# Altium PCB BLDC_DRIVER_DOOR.PcbDoc
Units mm, origin at the board's own origin, x right, y up, seen from the top; angles counter-clockwise.
Board outline 60 x 40 mm, 2 copper layers (Top Layer, Bottom Layer); 66 components, 57 nets, 242 pads, 212 vias.
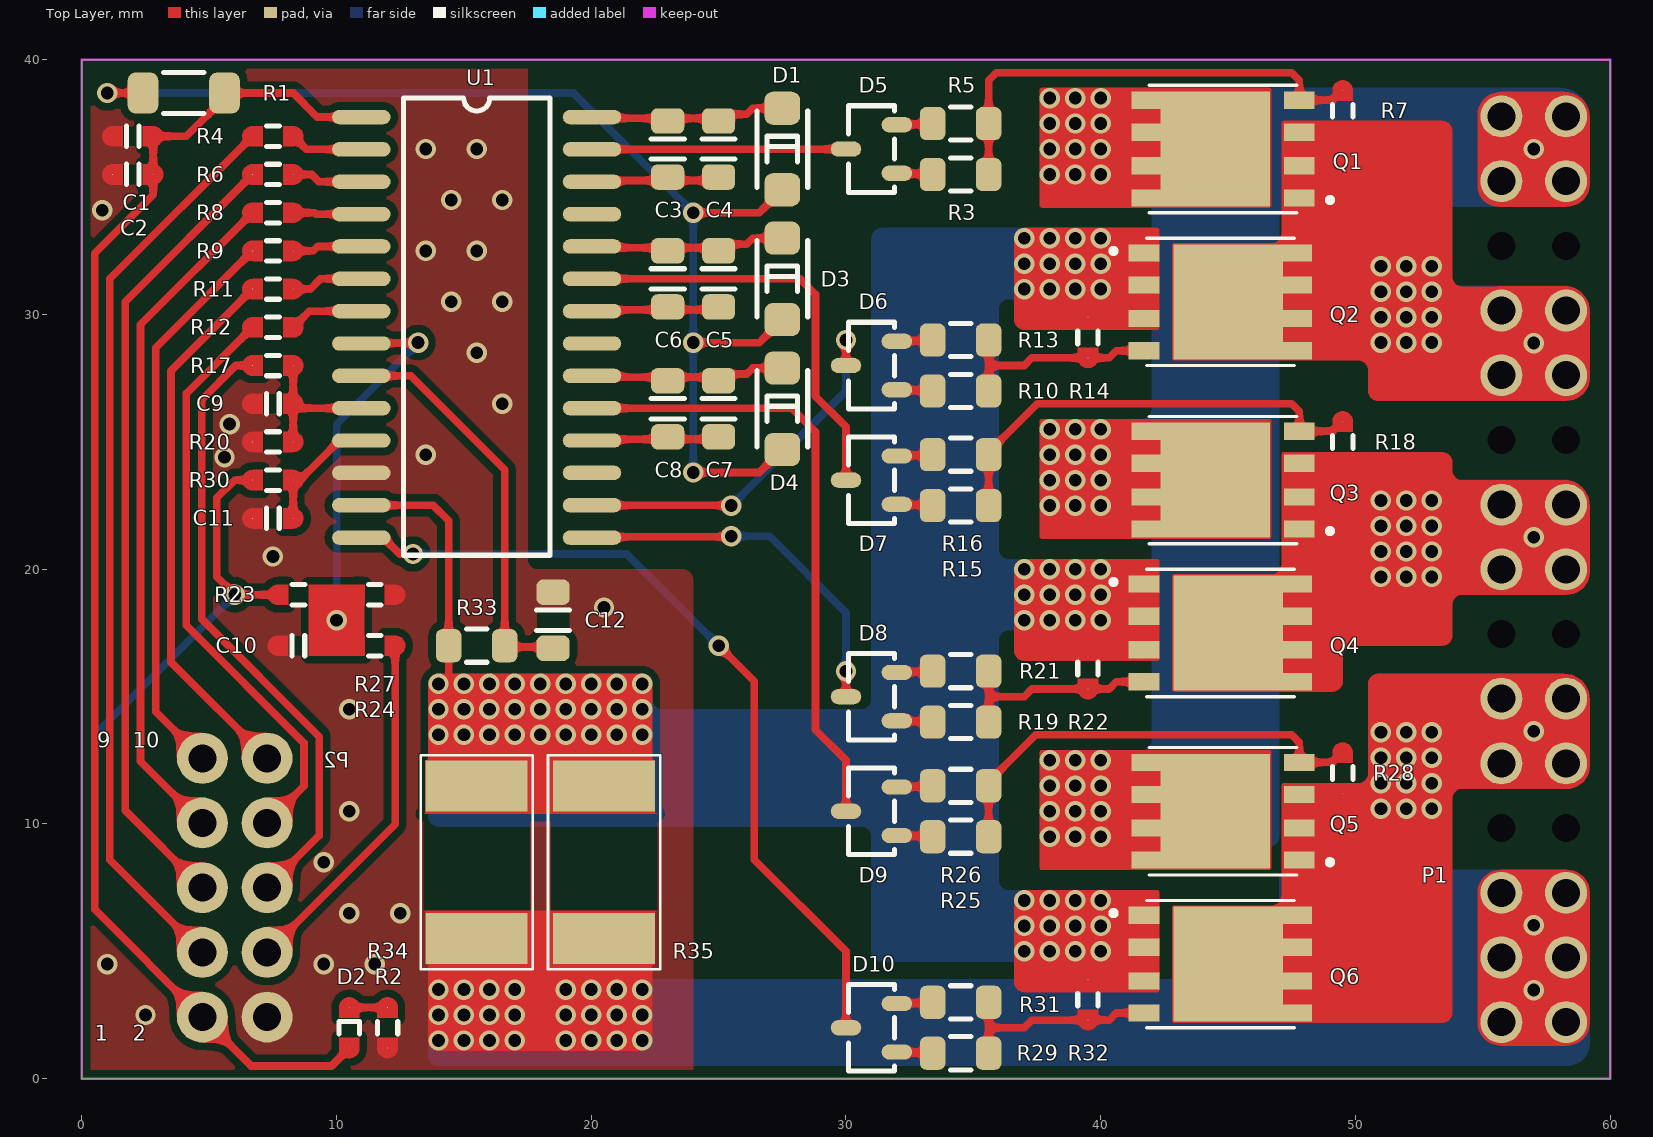
[diagram p0: Top Layer view]
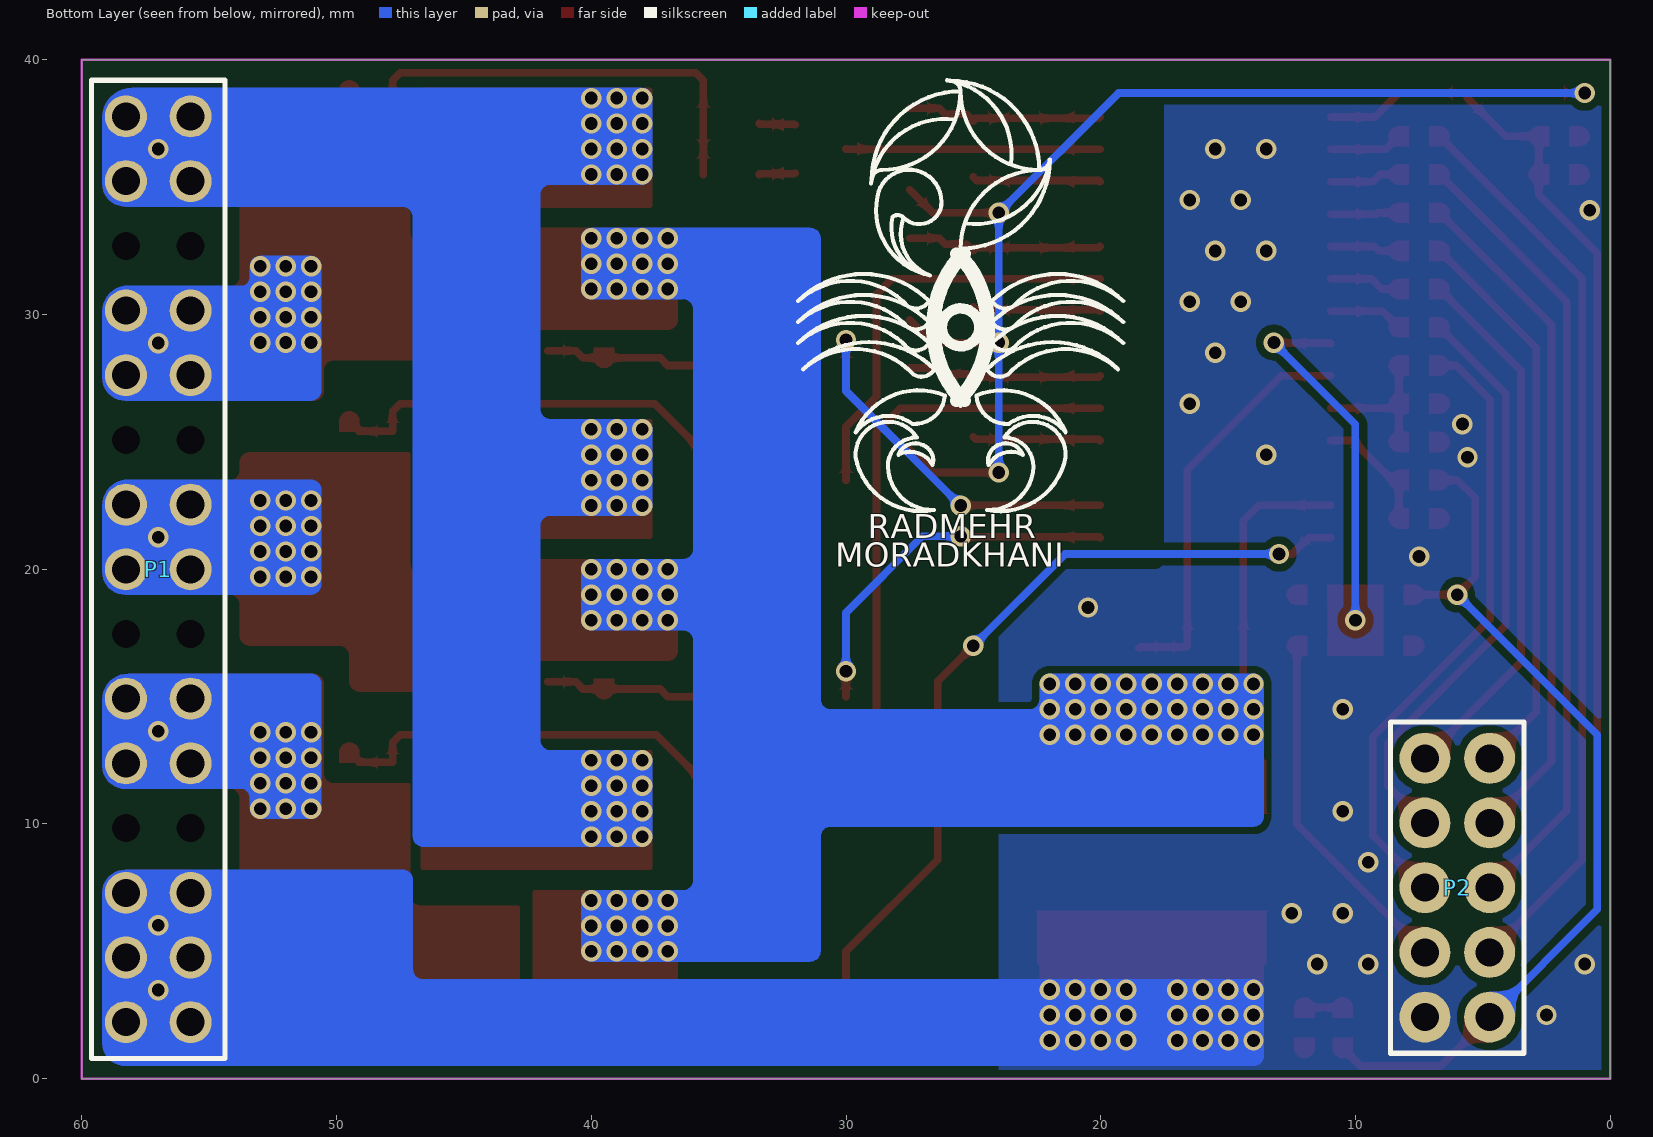
[diagram p1: Bottom Layer view, seen from below]
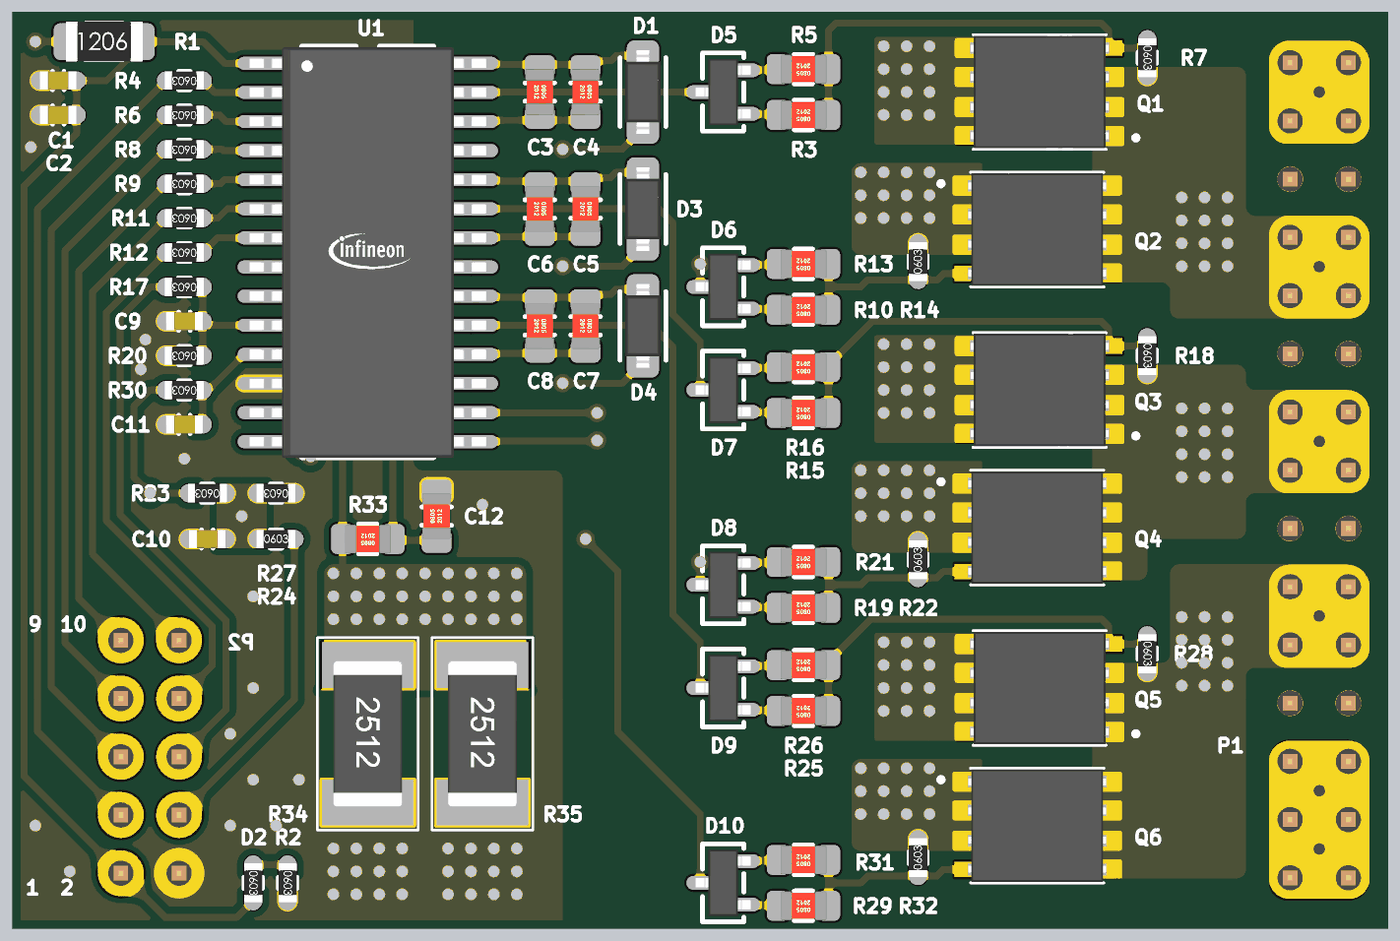
[diagram p2: 3D render of the assembled board from above, using the file's embedded part models]

## Layer stack, top to bottom
Top Solder: solder mask 0.0102, Solder Resist, Dk 3.5
Top Layer: signal copper 0.0356
Dielectric 1: dielectric 0.32, FR-4, Dk 4.8
Bottom Layer: signal copper 0.0356
Bottom Solder: solder mask 0.0102, Solder Resist, Dk 3.5

## Board outline
0,0 60,0 60,40 0,40

## Design rules (kind name [scope] priority, off if disabled: settings)
Clearance [All] p1: gap=0.3 ignorepadtopadclearanceinfootprint=FALSE
PlaneConnect [All] p1: planeconnectstyle=Relief reliefexpansion=0.508 reliefentries=4 reliefconductorwidth=0.3 reliefairgap=0.3
PolygonConnect [All] p1: connectstyle=Direct reliefconductorwidth=0.254 reliefentries=4 polygonreliefangle="90 Angle" airgapwidth=0.254
RoutingVias [All] p1: holewidth=0.5 width=0.8 viastyle="Through Hole" minholewidth=0.5 minwidth=0.8 maxholewidth=0.5 maxwidth=0.8
SolderMaskExpansion [All] p1: expansion=0.102 istentingtop=FALSE
Width [All] p1: maxlimit=1.2 minlimit=0.3 preferedwidth=0.6 minimp=50.000000 maximp=50.000000 favimp=50.000000
29 further rules are at their usual default settings.

## Components (designator, comment, footprint, x,y, rotation, side; value= is the part's Value field where it differs from the comment)
C1 "1U" "C 0603" 2,37 r0 top
C2 "100N" "C 0603" 2,35.5 r0 top
C3 "1U" "C 0805" 23,36.5 r90 top
C4 "100N" "C 0805" 25,36.5 r90 top
C5 "1U" "C 0805" 25,31.4 r90 top
C6 "100N" "C 0805" 23,31.4 r90 top
C7 "1U" "C 0805" 25,26.3 r90 top
C8 "100N" "C 0805" 23,26.3 r90 top
C9 "1U" "C 0603" 7.5,26.5 r0 top
C10 "100N" "C 0603" 8.5,17 r0 top
C11 "1N" "C 0603" 7.5,22 r0 top
C12 "1N" "C 0805" 18.5,18 r270 top
D1 "1N4148" "D SOD-123" 27.5,36.5 r90 top
D2 "LED_SMD" "D 0603" 10.5,2 r90 top
D3 "1N4148" "D SOD-123" 27.5,31.4 r90 top
D4 "1N4148" "D SOD-123" 27.5,26.3 r90 top
D5 "BAT54S" SOT-23_3_D 31,36.5 r180 top
D6 "BAT54S" SOT-23_3_D 31,28 r180 top
D7 "BAT54S" SOT-23_3_D 31,23.5 r180 top
D8 "BAT54S" SOT-23_3_D 31,15 r180 top
D9 "BAT54S" SOT-23_3_D 31,10.5 r180 top
D10 "BAT54S" SOT-23_3_D 31,2 r180 top
P1 "61303021121" 61303021121 57,20 r90 bottom
P2 "61301021121" 61301021121 6,7.5 r90 bottom
Q1 "CSD19533Q5A" Q5A 44.5,36.5 r180 top
Q2 "CSD19533Q5A" Q5A 45,30.5 r0 top
Q3 "CSD19533Q5A" Q5A 44.5,23.5 r180 top
Q4 "CSD19533Q5A" Q5A 45,17.5 r0 top
Q5 "CSD19533Q5A" Q5A 44.5,10.5 r180 top
Q6 "CSD19533Q5A" Q5A 45,4.5 r0 top
R1 "10R" "R 1206" 4,38.7 r0 top
R2 "4.7K" "R 0603" 12,2 r90 top
R3 "56R" "R 0805" 34.5,35.5 r0 top
R4 "1K" "R 0603" 7.5,37 r0 top
R5 "100R" "R 0805" 34.5,37.5 r0 top
R6 "1K" "R 0603" 7.5,35.5 r0 top
R7 "10K" "R 0603" 49.5,38 r90 top
R8 "1K" "R 0603" 7.5,34 r0 top
R9 "1K" "R 0603" 7.5,32.5 r0 top
R10 "56R" "R 0805" 34.5,27 r0 top
R11 "1K" "R 0603" 7.5,31 r0 top
R12 "1K" "R 0603" 7.5,29.5 r0 top
R13 "100R" "R 0805" 34.5,29 r0 top
R14 "10K" "R 0603" 39.5,29.1 r270 top
R15 "56R" "R 0805" 34.5,22.5 r0 top
R16 "100R" "R 0805" 34.5,24.5 r0 top
R17 "1K" "R 0603" 7.5,28 r0 top
R18 "10K" "R 0603" 49.5,25 r90 top
R19 "56R" "R 0805" 34.5,14 r0 top
R20 "10K" "R 0603" 7.5,25 r0 top
R21 "100R" "R 0805" 34.5,16 r0 top
R22 "10K" "R 0603" 39.5,16.1 r270 top
R23 "12K" "R 0603" 8.5,19 r0 top
R24 "1K" "R 0603" 11.5,17 r180 top
R25 "56R" "R 0805" 34.5,9.5 r0 top
R26 "100R" "R 0805" 34.5,11.5 r0 top
R27 "3.3K" "R 0603" 11.5,19 r0 top
R28 "10K" "R 0603" 49.5,12 r90 top
R29 "56R" "R 0805" 34.5,1 r0 top
R30 "10K" "R 0603" 7.5,23.5 r0 top
R31 "100R" "R 0805" 34.5,3 r0 top
R32 "10K" "R 0603" 39.5,3.1 r270 top
R33 "10K" "R 0805" 15.5,17 r0 top
R34 "0R1" "R 2512" 15.5,8.5 r90 top
R35 "0R1" "R 2512" 20.5,8.5 r90 top
U1 "6EDL04I06PT" SOIC-28 15.5,29.5 r0 top

## Footprints (in the part's own frame and the unit in brackets; to place one, negate y for a bottom-side part, rotate by r counter-clockwise, add the part's x,y. Pads: shape width x height; smd on the part's side, far side on the other; paste and mask are expansions set on the pad)
61301021121 [mm] "Pin Header, pitch 2.54 mm, THT, Vertical, dual row, 10p"
  round 2 hole 1.1: 1(-5.08,-1.27) 2(-5.08,1.27) 3(-2.54,-1.27) 4(-2.54,1.27) 5(0,-1.27) 6(0,1.27) 7(2.54,-1.27) 8(2.54,1.27) 9(5.08,-1.27) 10(5.08,1.27)
  silkscreen extent -6.5,-2.62 6.5,2.62, body extent -6.35,-2.54 6.35,2.54, height 8.59
61303021121 [mm] "Pin Header, pitch 2.54 mm, THT, Vertical, dual row, 30p"
  round 1.65 hole 1.1: 1(-17.78,-1.27) 2(-17.78,1.27) 3(-15.24,-1.27) 4(-15.24,1.27) 5(-12.7,-1.27) 6(-12.7,1.27) 9(-7.62,-1.27) 10(-7.62,1.27) 11(-5.08,-1.27) 12(-5.08,1.27) 15(0,-1.27) 16(0,1.27) 17(2.54,-1.27) 18(2.54,1.27) 21(7.62,-1.27) 22(7.62,1.27) 23(10.16,-1.27) 24(10.16,1.27) 27(15.24,-1.27) 28(15.24,1.27) 29(17.78,-1.27) 30(17.78,1.27)
  round 0 hole 1.1: 7(-10.16,-1.27) 8(-10.16,1.27) 13(-2.54,-1.27) 14(-2.54,1.27) 19(5.08,-1.27) 20(5.08,1.27) 25(12.7,-1.27) 26(12.7,1.27)
  silkscreen extent -19.2,-2.62 19.2,2.62, body extent -19.05,-2.54 19.05,2.54, height 8.59
"C 0603" [mil] "C?"
  round 1 smd mask+1.97: 1(-31.5,0) 2(31.5,0)
  Top Layer pour cut-out: -15.75,15.75 15.75,15.75 15.75,-15.75 -15.75,-15.75
  Top Layer region: -47.24,0 -46.04,6.03 -42.63,11.14 -37.52,14.55 -31.5,15.75 -31.5,15.75 -15.75,15.75 -15.75,-15.75 -31.5,-15.75 -37.52,-14.55 -42.63,-11.14 -46.04,-6.03 -47.24,0
  Top Layer region: 47.24,0 46.05,-6.03 42.63,-11.14 37.52,-14.55 31.5,-15.75 31.5,-15.75 15.75,-15.75 15.75,15.75 31.5,15.75 37.52,14.55 42.63,11.14 46.05,6.03 47.24,0
  silkscreen extent -10,-16 10,16, body extent -32,-16 31,16, height 35
"C 0805" [mm] "C?"
  rrect50% 1x1.3 smd: 1(-1.1,0) 2(1.1,0)
  Top Layer pour cut-out: -0.5,0.65 0.5,0.65 0.5,-0.65 -0.5,-0.65
  silkscreen extent -0.4,-0.65 0.4,0.65, body extent -1,-0.63 1,0.62, height 0.9
"D 0603" [mil] "D?"
  round 1 smd mask+1.97: 1(-31.5,0) 2(31.5,0)
  Top Layer pour cut-out: -15.75,15.75 15.75,15.75 15.75,-15.75 -15.75,-15.75
  Top Layer region: -47.24,0 -46.04,6.03 -42.63,11.14 -37.52,14.55 -31.5,15.75 -31.5,15.75 -15.75,15.75 -15.75,-15.75 -31.5,-15.75 -37.52,-14.55 -42.63,-11.14 -46.04,-6.03 -47.24,0
  Top Layer region: 47.24,0 46.05,-6.03 42.63,-11.14 37.52,-14.55 31.5,-15.75 31.5,-15.75 15.75,-15.75 15.75,15.75 31.5,15.75 37.52,14.55 42.63,11.14 46.05,6.03 47.24,0
  silkscreen extent -10,-16 10,16, body extent -33,-16 33,16, height 22
"D SOD-123" [mm] "D?"
  rrect50% 1.3x1.4 smd mask+0.1: 1(-1.6,0) 2(1.6,0)
  Top Layer pour cut-out: -1,0.9 1,0.9 1,-0.9 -1,-0.9
  silkscreen extent -1.5,-1 1.5,1, body extent -1.83,-0.77 1.83,0.77, height 1.54
Q5A [mm] "Q?"
  rect 1.2x0.675 smd paste-1: 1(-3.301,-1.917) 2(2.699,1.917) 2(2.699,-0.66) 2(2.699,0.66) 2(2.699,-1.917) 3(-3.301,-0.66) 3(-3.301,0.66) 3(-3.301,1.917)
  rect 4.295x4.51 smd paste-3: 2(0,0)
  silkscreen extent -4.55,-2.5 2.6,2.5, body extent -3.3,-2.45 2.7,2.45, height 1.11
"R 0603" [mil] "R?"
  round 1 smd mask+1.97: 1(-31.5,0) 2(31.5,0)
  Top Layer pour cut-out: -15.75,15.75 15.75,15.75 15.75,-15.75 -15.75,-15.75
  Top Layer region: 47.24,0 46.05,-6.03 42.63,-11.14 37.52,-14.55 31.5,-15.75 31.5,-15.75 15.75,-15.75 15.75,15.75 31.5,15.75 37.52,14.55 42.63,11.14 46.05,6.03 47.24,0
  Top Layer region: -47.24,0 -46.04,6.03 -42.63,11.14 -37.52,14.55 -31.5,15.75 -31.5,15.75 -15.75,15.75 -15.75,-15.75 -31.5,-15.75 -37.52,-14.55 -42.63,-11.14 -46.04,-6.03 -47.24,0
  silkscreen extent -10,-16 10,16, body extent -33,-16 33,16, height 22
"R 0805" [mm] "R?"
  rrect50% 1x1.3 smd: 1(-1.1,0) 2(1.1,0)
  Top Layer pour cut-out: -0.5,0.65 0.5,0.65 0.5,-0.65 -0.5,-0.65
  silkscreen extent -0.4,-0.65 0.4,0.65, body extent -1,-0.63 1,0.62, height 0.9
"R 1206" [mm] "R?"
  rrect50% 1.2x1.6 smd: 1(-1.6,0) 2(1.6,0)
  Top Layer pour cut-out: -0.9,0.8 0.9,0.8 0.9,-0.8 -0.9,-0.8
  silkscreen extent -0.8,-0.8 0.8,0.8, body extent -1.67,-0.86 1.68,0.87, height 0.85
"R 2512" [mm] "R?"
  rect 2x4 smd: 1(-3,0) 2(3,0)
  Top Layer pour cut-out: -1.9,2.1 1.9,2.1 1.9,-2.1 -1.9,-2.1
  silkscreen extent -4.2,-2.2 4.2,2.2, body extent -3.17,-1.5 3.17,1.5, height 1.6
SOIC-28 [mm] "U?"
  oval 2.298x0.567 smd paste+0 mask+0.102: 1(-4.528,8.255) 2(-4.528,6.985) 3(-4.528,5.715) 4(-4.528,4.445) 5(-4.528,3.175) 6(-4.528,1.905) 7(-4.528,0.635) 8(-4.528,-0.635) 9(-4.528,-1.905) 10(-4.528,-3.175) 11(-4.528,-4.445) 12(-4.528,-5.715) 13(-4.528,-6.985) 14(-4.528,-8.255) 15(4.528,-8.255) 16(4.528,-6.985) 17(4.528,-5.715) 18(4.528,-4.445) 19(4.528,-3.175) 20(4.528,-1.905) 21(4.528,-0.635) 22(4.528,0.635) 23(4.528,1.905) 24(4.528,3.175) 25(4.528,4.445) 26(4.528,5.715) 27(4.528,6.985) 28(4.528,8.255)
  silkscreen extent -2.88,-8.95 2.88,9, body extent -5.16,-8.95 5.16,8.95, height 2.65
SOT-23_3_D [mm] "D?"
  oval 1.2x0.6 smd: 1(-1,0.95) 2(-1,-0.95) 3(1,0)
  silkscreen extent -0.9,-1.7 0.9,1.7, body extent -1.2,-1.45 1.2,1.45, height 1.16

## Part data
C1 C2 C3 C4 C5 C6 C7 C8 C9 C10 C11 C12: library part CAP_SMD, "CAP_SMD"
D1 D3 D4: library part DIOD_SMD, "DIOD_SMD"
P1: "WR-PHD Pin Header, THT, pitch 2.54mm, Dual Row, Vertical, 30p", Contact Resistance=20mOhm, Manufacturer="Wurth Elektronik", Operating Temperature="-40 to +105degC", Rated Current=3A, Withstanding Voltage=500VAC, Working Voltage=250VAC, ComponentLink1Description=Manufacturer, ComponentLink1URL=http://www.we-online.de, ComponentLink2Description=Datasheet, ComponentLink2URL=https://www.we-online.com/catalog/datasheet/61303021121.pdf, Gender="Pin Header", Manufacturer Part Number=61303021121, Mounting Technology=THT, Orientation=Vertical, Packaging=Bag, Pin Number=30, Pitch=2.54mm, Row Number=Dual
P2: "WR-PHD Pin Header, THT, pitch 2.54mm, Dual Row, Vertical, 10p", Contact Resistance=20mOhm, Manufacturer="Wurth Elektronik", Operating Temperature="-40 to +105degC", Rated Current=3A, Withstanding Voltage=500VAC, Working Voltage=250VAC, ComponentLink1Description=Manufacturer, ComponentLink1URL=http://www.we-online.de, ComponentLink2Description=Datasheet, ComponentLink2URL=https://www.we-online.com/catalog/datasheet/61301021121.pdf, Gender="Pin Header", Manufacturer Part Number=61301021121, Mounting Technology=THT, Orientation=Vertical, Packaging=Bag, Pin Number=10, Pitch=2.54mm, Row Number=Dual
R1 R2 R3 R4 R5 R6 R7 R8 R9 R10 R11 R12 R13 R14 R15 R16 R17 R18 R19 R20 R21 R22 R23 R24 R25 R26 R27 R28 R29 R30 R31 R32 R33 R34 R35: library part RES_SMD, "RES_SMD"

## Via types
v1: diameter 0.8, hole 0.5, Top Layer to Bottom Layer, tented both sides, 212 vias

## Nets (pads, with @x,y where several pads share a name; then routed paths per layer and width w, separated by ;. In a path a pad name is that pad's centre, name@x,y a point inside that pad or via, vN(x,y) a via of type N, cw(c..) or ccw(c..) an arc to the next point about the centre after c; other vN are vias at no path point)
+15V0: C1.2 C2.2 D2.1 P2.1 R1.2 R23.1 R30.1 U1.1 | length 81.4
  Top Layer w0.3: R1.2@5.6,38.5 4.1,37 C1.2 C2.2 2.8,34.7 0.5,32.4 0.5,6.65 P2.1 6.65,0.5 9.8,0.5 D2.1 ; R1.2 8.3,38.7 9.245,37.755 U1.1 ; R30.1 6,23.5 5.3,22.8 5.3,19.7 v1(6,19) R23.1
  Bottom Layer w0.3: P2.1 0.5,6.65 0.5,13.5 v1(6,19)
+24V0: P1.27 P1.28 P1.29 P1.30 Q1.2 Q3.2 Q5.2
  other v1: 38,9.5 39,9.5 40,9.5 38,10.5 39,10.5 40,10.5 38,11.5 39,11.5 40,11.5 38,12.5 38,12.5 39,12.5 39,12.5 40,12.5 40,12.5 38,22.5 39,22.5 40,22.5 38,23.5 39,23.5 40,23.5 38,24.5 39,24.5 40,24.5 38,25.5 38,25.5 39,25.5 39,25.5 40,25.5 40,25.5 38,35.5 39,35.5 40,35.5 38,36.5 39,36.5 40,36.5 57,36.5 38,37.5 39,37.5 40,37.5 38,38.5 38,38.5 39,38.5 39,38.5 40,38.5 40,38.5
ENABLE: P2.6 R17.1 | length 24.5
  Top Layer w0.3: R17.1 6.049,28 4.7,26.651 4.7,18.049 9.32,13.429 9.32,9.55 P2.6
FAULT: P2.4 R24.1 | length 14.1
  Top Layer w0.3: P2.4 12.3,9.99 R24.1
GND: C1.1 C2.1 C9.1 C10.1 C11.1 C12.1 P1.1 P1.2 P1.3 P1.4 P1.5 P1.6 P2.2 R2.1 R20.1 R27.2 R34.1 R35.1 U1.12
  other v1: 14,1.5 15,1.5 16,1.5 17,1.5 19,1.5 20,1.5 21,1.5 22,1.5 2.5,2.5 14,2.5 15,2.5 16,2.5 17,2.5 19,2.5 20,2.5 21,2.5 22,2.5 57,3.48 14,3.5 15,3.5 16,3.5 17,3.5 19,3.5 20,3.5 21,3.5 22,3.5 1,4.5 9.5,4.5 11.5,4.5 57,6.02 10.5,6.5 12.5,6.5 9.5,8.5 10.5,10.5 10.5,14.5 20.5,18.5 7.5,20.5 5.6,24.4 13.5,24.5 5.8,25.7 16.5,26.5 15.5,28.5 14.5,30.5 16.5,30.5 13.5,32.5 15.5,32.5 0.8,34.1 14.5,34.5 16.5,34.5 13.5,36.5 15.5,36.5
NetC3_1: C3.1 C4.1 U1.26 | length 5
  Top Layer w0.3: U1.26 20.079,35.266 24.866,35.266 C4.1
NetC3_2: C3.2 C4.2 D1.2 U1.28 | length 7.7
  Top Layer w0.3: U1.28 20.079,37.704 24.896,37.704 C4.2 25.266,37.866 26.1,37.866 26.334,38.1 D1.2
NetC5_1: C5.1 C6.1 U1.22 | length 5
  Top Layer w0.3: U1.22 20.079,30.186 24.886,30.186 C5.1
NetC5_2: C5.2 C6.2 D3.2 U1.24 | length 7.8
  Top Layer w0.3: U1.24 20.079,32.624 24.876,32.624 C5.2 25.266,32.766 26.1,32.766 26.334,33 D3.2
NetC7_1: C7.1 C8.1 U1.18 | length 5
  Top Layer w0.3: U1.18 20.079,25.106 24.906,25.106 C7.1
NetC7_2: C7.2 C8.2 D4.2 U1.20 | length 7.8
  Top Layer w0.3: U1.20 20.079,27.544 24.856,27.544 C7.2 25.266,27.666 26.1,27.666 26.334,27.9 D4.2
NetC9_2: C9.2 R17.2 R20.2 U1.10 | length 5.7
  Top Layer w0.3: R20.2 C9.2 ; R17.2 C9.2 ; U1.10 8.475,26.325 C9.2
NetC10_2: C10.2 R23.2 R24.2 R27.1 U1.8 | length 14.5
  Top Layer w0.3: U1.8 10.989,28.883 13.182,28.883 v1(13.2,28.9)
  Bottom Layer w0.3: v1(10,18) 10,25.7 v1(13.2,28.9)
NetC11_2: C11.2 R30.2 U1.11 | length 4.8
  Top Layer w0.3: C11.2 R30.2 8.552,23.5 10.107,25.055 U1.11
NetC12_2: C12.2 R33.2 U1.9 | length 16
  Top Layer w0.3: U1.9 12.905,27.595 16.6,23.9 R33.2 16.65,16.95 18.45,16.95 C12.2
NetD1_1: D1.1 D3.1 D4.1 R1.1 | length 48.2
  Top Layer w0.3: v1(1,38.7) R1.1 ; v1(24,23.8) 26.6,23.8 D4.1 ; v1(24,28.9) 26.6,28.9 D3.1 ; v1(24,34) 26.6,34 D1.1
  Bottom Layer w0.3: v1(1,38.7) 19.3,38.7 v1(24,34) v1(24,28.9) v1(24,23.8)
NetD2_2: D2.2 R2.2 | length 1.5
  Top Layer w0.3: D2.2 R2.2
NetD5_1: D5.1 R3.1 | length 1.4
  Top Layer w0.3: D5.1 32.025,35.525 33.375,35.525 R3.1
NetD5_2: D5.2 R5.1 | length 1.4
  Top Layer w0.3: D5.2 32.025,37.475 33.375,37.475 R5.1
NetD5_3: D5.3 U1.27 | length 10
  Top Layer w0.3: U1.27 20.036,36.493 29.992,36.493 D5.3
NetD6_1: D6.1 R10.1 | length 1.4
  Top Layer w0.3: D6.1 32.025,27.025 33.375,27.025 R10.1
NetD6_2: D6.2 R13.1 | length 1.4
  Top Layer w0.3: D6.2 32.025,28.975 33.375,28.975 R13.1
NetD6_3: D6.3 U1.16 | length 14.8
  Top Layer w0.3: U1.16 20.036,22.507 25.493,22.507 v1(25.5,22.5) ; D6.3 v1(30,29)
  Bottom Layer w0.3: v1(25.5,22.5) 30,27 v1(30,29)
NetD7_1: D7.1 R15.1 | length 1.4
  Top Layer w0.3: D7.1 32.025,22.525 33.375,22.525 R15.1
NetD7_2: D7.2 R16.1 | length 1.4
  Top Layer w0.3: D7.2 32.025,24.475 33.375,24.475 R16.1
NetD7_3: D7.3 U1.23 | length 16.8
  Top Layer w0.3: U1.23 28.195,31.405 28.8,30.8 28.8,26.8 30,25.6 D7.3
NetD8_1: D8.1 R19.1 | length 1.4
  Top Layer w0.3: D8.1 32.025,14.025 33.375,14.025 R19.1
NetD8_2: D8.2 R21.1 | length 1.4
  Top Layer w0.3: D8.2 32.025,15.975 33.375,15.975 R21.1
NetD8_3: D8.3 U1.15 | length 14.5
  Top Layer w0.3: U1.15 20.056,21.273 25.472,21.273 v1(25.5,21.3) ; D8.3 v1(30,16)
  Bottom Layer w0.3: v1(25.5,21.3) 27,21.3 30,18.3 v1(30,16)
NetD9_1: D9.1 R25.1 | length 1.4
  Top Layer w0.3: D9.1 32.025,9.525 33.375,9.525 R25.1
NetD9_2: D9.2 R26.1 | length 1.4
  Top Layer w0.3: D9.2 32.025,11.475 33.375,11.475 R26.1
NetD9_3: D9.3 U1.19 | length 24.6
  Top Layer w0.3: U1.19 27.875,26.325 28.8,25.4 28.8,13.7 30,12.5 D9.3
NetD10_1: D10.1 R29.1 | length 1.4
  Top Layer w0.3: D10.1 32.025,1.025 33.375,1.025 R29.1
NetD10_2: D10.2 R31.1 | length 1.4
  Top Layer w0.3: D10.2 32.025,2.975 33.375,2.975 R31.1
NetD10_3: D10.3 U1.14 | length 32.9
  Top Layer w0.3: U1.14 11.837,21.245 12.482,20.6 v1(13,20.6) ; v1(25,17) 26.4,15.6 26.4,8.6 30,5 D10.3
  Bottom Layer w0.3: v1(13,20.6) 21.4,20.6 v1(25,17)
NetQ1_1: Q1.1 R3.2 R5.2 R7.2 | length 18.8
  Top Layer w0.3: R3.2 R5.2 35.6,39.2 35.9,39.5 47.5,39.5 47.801,39.199 Q1.1 49.117,38.417 R7.2
NetQ2_1: Q2.1 R10.2 R13.2 R14.2 | length 8.3
  Top Layer w0.3: R10.2 35.6,28 ; R13.2 35.6,28 ; Q2.1 40.609,28.583 40.327,28.3 R14.2 37.3,28.3 37,28 35.6,28
NetQ3_1: Q3.1 R15.2 R16.2 R18.2 | length 17.7
  Top Layer w0.3: R15.2 R16.2 ; R16.2@35.622,24.618 37.504,26.5 47.5,26.5 47.801,26.199 Q3.1 49.118,25.418 R18.2
NetQ4_1: Q4.1 R19.2 R21.2 R22.2 | length 8.3
  Top Layer w0.3: R19.2 35.6,15 ; R21.2 35.6,15 ; Q4.1 40.609,15.583 40.327,15.3 37.3,15.3 37,15 35.6,15
NetQ5_1: Q5.1 R25.2 R26.2 R28.2 | length 17.9
  Top Layer w0.3: R25.2 R26.2 35.6,11.65 37.45,13.5 47.5,13.5 47.801,13.199 Q5.1 49.117,12.417 R28.2
NetQ6_1: Q6.1 R29.2 R31.2 R32.2 | length 8.3
  Top Layer w0.3: R29.2 35.6,2 ; R31.2 35.6,2 ; Q6.1 40.609,2.583 40.327,2.3 R32.2 37.3,2.3 37,2 35.6,2
NetR4_2: R4.2 U1.2 | length 2.9
  Top Layer w0.3: R4.2 8.815,36.485 U1.2
NetR6_2: R6.2 U1.3 | length 2.8
  Top Layer w0.3: R6.2 9.025,35.5 9.31,35.215 U1.3
NetR8_2: R8.2 U1.4 | length 2.7
  Top Layer w0.3: R8.2 9.14,34 9.195,33.945 U1.4
NetR9_2: R9.2 U1.5 | length 2.7
  Top Layer w0.3: R9.2 9.08,32.5 9.255,32.675 U1.5
NetR11_2: R11.2 U1.6 | length 2.8
  Top Layer w0.3: R11.2 8.965,31 9.37,31.405 U1.6
NetR12_2: R12.2 U1.7 | length 2.9
  Top Layer w0.3: R12.2 8.935,30.135 U1.7
PH1H: P2.3 R4.1 | length 35.9
  Top Layer w0.3: P2.3 1.1,8.59 1.1,31.4 R4.1
PH1L: P2.9 R9.1 | length 22.3
  Top Layer w0.3: P2.9 2.9,14.41 2.9,28.7 R9.1
PH1O: P1.21 P1.22 P1.23 P1.24 Q1.3 Q2.2 R7.1
  other v1: 57,28.88 51,28.9 52,28.9 53,28.9 51,29.9 52,29.9 53,29.9 51,30.9 52,30.9 53,30.9 51,31.9 52,31.9 53,31.9
PH2H: P2.5 R6.1 | length 31.3
  Top Layer w0.3: P2.5 1.7,10.53 1.7,30.5 R6.1
PH2L: P2.10 R11.1 | length 21.3
  Top Layer w0.3: R11.1 3.5,27.8 3.5,16.35 P2.10
PH2O: P1.15 P1.16 P1.17 P1.18 Q3.3 Q4.2 R18.1
  other v1: 51,19.7 52,19.7 53,19.7 51,20.7 52,20.7 53,20.7 57,21.26 51,21.7 52,21.7 53,21.7 51,22.7 52,22.7 53,22.7
PH3H: P2.7 R8.1 | length 26.8
  Top Layer w0.3: P2.7 2.3,12.47 2.3,29.6 R8.1
PH3L: P2.8 R12.1 | length 23.1
  Top Layer w0.3: R12.1 4.1,26.9 4.1,17.801 8.72,13.181 8.72,11.49 P2.8
PH3O: P1.9 P1.10 P1.11 P1.12 Q5.3 Q6.2 R28.1
  other v1: 51,10.6 52,10.6 53,10.6 51,11.6 52,11.6 53,11.6 51,12.6 52,12.6 53,12.6 51,13.6 52,13.6 53,13.6 57,13.64
R_SH: Q2.3 Q4.3 Q6.3 R14.1 R22.1 R32.1 R33.1 R34.2 R35.2 U1.13 | length 10.7
  Top Layer w0.3: U1.13 13.785,22.515 14.4,21.9 R33.1 14.4,15 14.5,14.9
  other v1: 37,5 38,5 39,5 40,5 37,6 38,6 39,6 40,6 37,7 38,7 39,7 40,7 14,13.5 15,13.5 16,13.5 17,13.5 18,13.5 19,13.5 20,13.5 21,13.5 22,13.5 14,14.5 15,14.5 16,14.5 17,14.5 18,14.5 19,14.5 20,14.5 21,14.5 22,14.5 14,15.5 15,15.5 16,15.5 17,15.5 18,15.5 19,15.5 20,15.5 21,15.5 22,15.5 37,18 38,18 39,18 40,18 37,19 38,19 39,19 40,19 37,20 38,20 39,20 40,20 37,31 38,31 39,31 40,31 37,32 38,32 39,32 40,32 37,33 38,33 39,33 40,33
pads on no net: P1.7 P1.8 P1.13 P1.14 P1.19 P1.20 P1.25 P1.26 U1.17 U1.21 U1.25

## Polygon pours and split planes (outlines as drawn)
GND on Top Layer "GND_L01_P000" (solid, remove dead copper, pour order 0): 0,40 60,40 60,0 0,0
GND on Bottom Layer "GND_L02_P001" (solid, remove dead copper, pour order 1): 0,40 60,40 60,0 0,0

## Keep-outs
Keep-Out Layer:
  the board outline again, w0.1

## Other copper
Top Layer:
  rectangle net NetC10_2: 8.9,16.6 11.1,19.4
  pour cut-out: 60,40 60,0 24,0 24,19.6 ccw(c23.6,19.6) 23.6,20 17.9,20 cw(c17.9,20.4) 17.5,20.4 17.5,40
  region net +24V0: 55.7,38.74 58.2,38.74 cw(c58.2,37.74) 59.2,37.74 59.2,35.14 cw(c58.3,35.14) 58.3,34.24 55.6,34.24 cw(c55.6,35.04) 54.8,35.04 54.8,37.84 cw(c55.7,37.84)
  region net PH1O: 47.1,37.5 cw(c47.2,37.5) 47.2,37.6 49.9,37.6 53.4,37.6 cw(c53.4,37.2) 53.8,37.2 53.8,31.5 ccw(c54.2,31.5) 54.2,31.1 58.22,31.1 cw(c58.22,30.12) 59.2,30.12 59.2,27.52 cw(c58.3,27.52) 58.3,26.62 50.88,26.62 cw(c50.88,27) 50.5,27 50.5,27.8 ccw(c50.1,27.8) 50.1,28.2 42.9,28.2 cw(c42.9,28.3) 42.8,28.3 42.8,32.7 cw(c42.9,32.7) 42.9,32.8 46.7,32.8 ccw(c46.7,33.2) 47.1,33.2
  region net PH2O: 47.1,24.5 cw(c47.2,24.5) 47.2,24.6 49.9,24.6 53.4,24.6 cw(c53.4,24.2) 53.8,24.2 53.8,23.9 ccw(c54.2,23.9) 54.2,23.5 58.2,23.5 cw(c58.2,22.5) 59.2,22.5 59.2,19.9 cw(c58.3,19.9) 58.3,19 54.2,19 ccw(c54.2,18.6) 53.8,18.6 53.8,17.4 cw(c53.4,17.4) 53.4,17 49.9,17 ccw(c49.9,16.6) 49.5,16.6 49.5,15.6 cw(c49.1,15.6) 49.1,15.2 42.9,15.2 cw(c42.9,15.3) 42.8,15.3 42.8,19.7 cw(c42.9,19.7) 42.9,19.8 46.7,19.8 ccw(c46.7,20.2) 47.1,20.2
  region net PH3O: 47.1,11.5 cw(c47.2,11.5) 47.2,11.6 49.9,11.6 50.1,11.6 ccw(c50.1,12) 50.5,12 50.5,15.5 cw(c50.9,15.5) 50.9,15.9 58.18,15.9 cw(c58.18,14.88) 59.2,14.88 59.2,12.28 cw(c58.3,12.28) 58.3,11.38 54.18,11.38 ccw(c54.18,11) 53.8,11 53.8,2.6 cw(c53.4,2.6) 53.4,2.2 42.9,2.2 cw(c42.9,2.3) 42.8,2.3 42.8,6.7 cw(c42.9,6.7) 42.9,6.8 46.7,6.8 ccw(c46.7,7.2) 47.1,7.2
  region net R_SH: 22,15.9 cw(c22,15.5) 22.4,15.5 22.4,12.6 ccw(c22.5,12.6) 22.5,12.5 22.5,10.5 ccw(c22.6,10.5) 22.6,10.4 13.4,10.4 ccw(c13.4,10.5) 13.5,10.5 13.5,12.5 ccw(c13.5,12.6) 13.6,12.6 13.6,15.5 cw(c14,15.5) 14,15.9
  region net R_SH: 37,33.4 42.2,33.4 cw(c42.2,33.3) 42.3,33.3 42.3,29.5 cw(c42.2,29.5) 42.2,29.4 37,29.4 cw(c37,29.8) 36.6,29.8 36.6,33 cw(c37,33)
  region net R_SH: 37,20.4 42.2,20.4 cw(c42.2,20.3) 42.3,20.3 42.3,16.5 cw(c42.2,16.5) 42.2,16.4 37,16.4 cw(c37,16.8) 36.6,16.8 36.6,20 cw(c37,20)
  region net R_SH: 37,7.4 42.2,7.4 cw(c42.2,7.3) 42.3,7.3 42.3,3.5 cw(c42.2,3.5) 42.2,3.4 37,3.4 cw(c37,3.8) 36.6,3.8 36.6,7 cw(c37,7)
  region net +24V0: 46.6,12.9 cw(c46.6,12.8) 46.7,12.8 46.7,8.3 cw(c46.6,8.3) 46.6,8.2 37.7,8.2 cw(c37.7,8.3) 37.6,8.3 37.6,12.8 cw(c37.7,12.8) 37.7,12.9
  region net +24V0: 46.6,38.9 cw(c46.6,38.8) 46.7,38.8 46.7,34.3 cw(c46.6,34.3) 46.6,34.2 37.7,34.2 cw(c37.7,34.3) 37.6,34.3 37.6,38.8 cw(c37.7,38.8) 37.7,38.9
  region net +24V0: 46.6,25.9 cw(c46.6,25.8) 46.7,25.8 46.7,21.3 cw(c46.6,21.3) 46.6,21.2 37.7,21.2 cw(c37.7,21.3) 37.6,21.3 37.6,25.8 cw(c37.7,25.8) 37.7,25.9
  region net GND: 55.7,8.2 58.3,8.2 cw(c58.3,7.3) 59.2,7.3 59.2,2.2 cw(c58.3,2.2) 58.3,1.3 55.7,1.3 cw(c55.7,2.2) 54.8,2.2 54.8,7.3 cw(c55.7,7.3)
  region net PH2O: 55.7,23.5 58.2,23.5 cw(c58.2,22.5) 59.2,22.5 59.2,19.9 cw(c58.3,19.9) 58.3,19 55.6,19 cw(c55.6,19.8) 54.8,19.8 54.8,22.6 cw(c55.7,22.6)
  region net PH1O: 55.7,31.12 58.2,31.12 cw(c58.2,30.12) 59.2,30.12 59.2,27.52 cw(c58.3,27.52) 58.3,26.62 55.6,26.62 cw(c55.6,27.42) 54.8,27.42 54.8,30.22 cw(c55.7,30.22)
  region net PH3O: 55.7,15.88 58.2,15.88 cw(c58.2,14.88) 59.2,14.88 59.2,12.28 cw(c58.3,12.28) 58.3,11.38 55.6,11.38 cw(c55.6,12.18) 54.8,12.18 54.8,14.98 cw(c55.7,14.98)
  region net GND: 22,1.1 14,1.1 cw(c14,1.5) 13.6,1.5 13.6,4.4 ccw(c13.5,4.4) 13.5,4.5 13.5,6.5 ccw(c13.4,6.5) 13.4,6.6 22.6,6.6 ccw(c22.6,6.5) 22.5,6.5 22.5,4.5 ccw(c22.5,4.4) 22.4,4.4 22.4,1.5
Bottom Layer:
  region net PH3O: 50.6,12.6 50.6,10.6 ccw(c51,10.6) 51,10.2 53,10.2 ccw(c53,10.6) 53.4,10.6 53.4,11 cw(c53.8,11) 53.8,11.4 53.8,12.6
  region net PH1O: 50.6,29.9 50.6,31.9 cw(c51,31.9) 51,32.3 53,32.3 cw(c53,31.9) 53.4,31.9 53.4,31.5 ccw(c53.8,31.5) 53.8,31.1 53.8,29.9
  pour cut-out: 60,40 60,0 24,0 24,19.6 ccw(c23.6,19.6) 23.6,20 17.9,20 cw(c17.9,20.4) 17.5,20.4 17.5,40
  region net GND: 58.3,8.2 cw(c58.3,7.3) 59.2,7.3 59.2,1.4 cw(c58.3,1.4) 58.3,0.5 14,0.5 cw(c14,0.9) 13.6,0.9 13.6,3.5 cw(c14,3.5) 14,3.9 46.6,3.9 ccw(c46.6,4.3) 47,4.3 47,7.8 cw(c47.4,7.8) 47.4,8.2
  region net R_SH: 22.4,15.5 22.4,14.9 ccw(c22.8,14.9) 22.8,14.5 30.6,14.5 ccw(c30.6,14.9) 31,14.9 31.4,14.9 31.4,9.5 31,9.5 ccw(c30.6,9.5) 30.6,9.9 14,9.9 cw(c14,10.3) 13.6,10.3 13.6,15.5 cw(c14,15.5) 14,15.9 22,15.9 cw(c22,15.5)
  region net PH1O: 50.6,30.74 cw(c51,30.74) 51,31.14 58.18,31.14 cw(c58.18,30.12) 59.2,30.12 59.2,27.52 cw(c58.3,27.52) 58.3,26.62 51.02,26.62 cw(c51.02,27.04) 50.6,27.04
  region net PH2O: 50.6,23.12 cw(c51,23.12) 51,23.52 58.18,23.52 cw(c58.18,22.5) 59.2,22.5 59.2,19.9 cw(c58.3,19.9) 58.3,19 51.02,19 cw(c51.02,19.42) 50.6,19.42
  region net PH3O: 50.6,15.5 cw(c51,15.5) 51,15.9 58.18,15.9 cw(c58.18,14.88) 59.2,14.88 59.2,12.28 cw(c58.3,12.28) 58.3,11.38 51.02,11.38 cw(c51.02,11.8) 50.6,11.8
  region net +24V0: 46.6,38.9 58.04,38.9 cw(c58.04,37.74) 59.2,37.74 59.2,35.14 cw(c58.3,35.14) 58.3,34.24 47.44,34.24 ccw(c47.44,33.8) 47,33.8 46.6,33.8
  region net R_SH: 40.172,33.361 ccw(c40,33) 40,33.4 31.4,33.4 ccw(c31.4,33) 31,33 31,5 ccw(c31.4,5) 31.4,4.6 40,4.6 ccw(c40,5) 40.4,5 40.4,7 ccw(c40,7) 40,7.4 36.4,7.4 cw(c36.4,7.8) 36,7.8 36,17.2 cw(c36.4,17.2) 36.4,17.6 40,17.6 ccw(c40,18) 40.4,18 40.4,20 ccw(c40,20) 40,20.4 36.4,20.4 cw(c36.4,20.8) 36,20.8 36,30.2 cw(c36.4,30.2) 36.4,30.6 40,30.6 ccw(c40,31) 40.4,31 40.4,33 ccw(c40,33)
  region net +24V0: 38,35.1 cw(c38,35.5) 37.6,35.5 37.6,38.5 cw(c38,38.5) 38,38.9 46.6,38.9 cw(c46.6,38.5) 47,38.5 47,9.5 cw(c46.6,9.5) 46.6,9.1 38,9.1 cw(c38,9.5) 37.6,9.5 37.6,12.5 cw(c38,12.5) 38,12.9 41.6,12.9 ccw(c41.6,13.3) 42,13.3 42,21.7 ccw(c41.6,21.7) 41.6,22.1 38,22.1 cw(c38,22.5) 37.6,22.5 37.6,25.5 cw(c38,25.5) 38,25.9 41.6,25.9 ccw(c41.6,26.3) 42,26.3 42,34.7 ccw(c41.6,34.7) 41.6,35.1
  region net GND: 55.7,8.2 58.3,8.2 cw(c58.3,7.3) 59.2,7.3 59.2,2.2 cw(c58.3,2.2) 58.3,1.3 55.7,1.3 cw(c55.7,2.2) 54.8,2.2 54.8,7.3 cw(c55.7,7.3)
  region net +24V0: 55.7,38.74 58.2,38.74 cw(c58.2,37.74) 59.2,37.74 59.2,35.14 cw(c58.3,35.14) 58.3,34.24 55.6,34.24 cw(c55.6,35.04) 54.8,35.04 54.8,37.84 cw(c55.7,37.84)
  region net PH1O: 55.7,31.12 58.2,31.12 cw(c58.2,30.12) 59.2,30.12 59.2,27.52 cw(c58.3,27.52) 58.3,26.62 55.6,26.62 cw(c55.6,27.42) 54.8,27.42 54.8,30.22 cw(c55.7,30.22)
  region net PH3O: 55.7,15.88 58.2,15.88 cw(c58.2,14.88) 59.2,14.88 59.2,12.28 cw(c58.3,12.28) 58.3,11.38 55.6,11.38 cw(c55.6,12.18) 54.8,12.18 54.8,14.98 cw(c55.7,14.98)
  region net PH2O: 55.7,23.5 58.2,23.5 cw(c58.2,22.5) 59.2,22.5 59.2,19.9 cw(c58.3,19.9) 58.3,19 55.6,19 cw(c55.6,19.8) 54.8,19.8 54.8,22.6 cw(c55.7,22.6)

## Silkscreen, mask and mechanical layers (free items; w line width, h text height)
Bottom Overlay:
  circle w0.412: c25.5,29.5 r0.741
  lines w0.162: 23.526,35.903 cw(c26.429,36.295) 26.038,39.198 ; 25.294,33.577 cw(c24.903,36.481) 21.999,36.09 ; 25.726,37.652 cw(c26.117,34.748) 29.021,35.14 ; 27.74,33.805 cw(c26.093,33.188) 26.711,31.54 ; 21.999,36.09 ccw(c22.411,36.09) 22.411,35.678 ; 21.999,36.09 ccw(c25.5,36.09) 25.5,32.589 ; 22.411,35.678 cw(c22.411,32.589) 25.5,32.589 ; 22.411,35.678 ccw(c22.411,38.767) 25.5,38.767 ; 22.411,35.678 cw(c25.912,35.678) 25.912,39.178 ccw(c25.912,38.767) 25.5,38.767 ; 25.5,32.589 ccw(c28.589,29.5) 25.5,26.411 ccw(c22.411,29.5) 25.5,32.589 ; 25.5,38.767 ccw(c28.589,38.767) 28.589,35.678 cw(c28.589,35.266) 29.001,35.266 ccw(c25.5,35.266) 25.5,38.767 ; 26.711,31.54 ccw(c26.302,33.416) 28.177,33.824 ccw(c27.965,33.596) 27.737,33.808 cw(c27.118,34.416) 26.25,34.431 cw(c27.518,34.42) 28.77,34.629 cw(c26.196,34.114) 26.711,31.54 ; 19.116,28.882 cw(c21.69,26.308) 24.264,28.882 cw(c23.75,29.191) 23.441,28.676 ccw(c21.176,26.617) 19.116,28.882 ; 19.116,29.706 cw(c21.69,27.132) 24.264,29.706 cw(c23.75,30.015) 23.441,29.5 ccw(c21.176,27.441) 19.116,29.706 ; 19.116,30.53 cw(c21.69,27.956) 24.264,30.53 cw(c23.75,30.839) 23.441,30.324 ccw(c21.176,28.264) 19.116,30.53 ; 19.322,27.853 cw(c21.896,25.279) 24.47,27.853 cw(c23.956,28.161) 23.647,27.647 ccw(c21.381,25.587) 19.322,27.853 ; 21.376,24.395 cw(c22.675,24.487) 23.78,25.177 ccw(c23.785,24.034) 22.642,24.028 ccw(c24.401,24.088) 24.46,22.329 cw(c23.951,24.905) 21.376,24.395 ; 21.381,25.381 cw(c23.853,24.352) 24.882,26.823 cw(c23.688,26.905) 23.605,25.711 ccw(c22.658,24.434) 21.381,25.381 ; 23.063,24.497 cw(c23.711,24.257) 23.951,24.905 cw(c23.767,24.271) 24.401,24.088 ccw(c23.527,23.624) 23.063,24.497 ; 26.118,26.823 ccw(c27.312,26.905) 27.395,25.711 cw(c28.342,24.434) 29.619,25.381 ccw(c27.147,24.352) 26.118,26.823 ; 26.53,27.853 ccw(c27.044,28.161) 27.353,27.647 cw(c29.618,25.587) 31.678,27.853 ccw(c29.104,25.279) 26.53,27.853 ; 26.54,22.329 ccw(c27.049,24.905) 29.624,24.395 ccw(c28.325,24.487) 27.22,25.177 cw(c27.215,24.034) 28.358,24.028 cw(c26.599,24.088) 26.54,22.329 ; 26.599,24.088 cw(c27.233,24.271) 27.049,24.905 cw(c27.289,24.257) 27.937,24.497 ccw(c27.473,23.624) 26.599,24.088 ; 26.736,28.882 ccw(c27.25,29.191) 27.559,28.676 cw(c29.824,26.617) 31.884,28.882 ccw(c29.31,26.308) 26.736,28.882 ; 26.736,29.706 ccw(c27.25,30.015) 27.559,29.5 cw(c29.824,27.441) 31.884,29.706 ccw(c29.31,27.132) 26.736,29.706 ; 26.736,30.53 ccw(c27.25,30.839) 27.559,30.324 cw(c29.824,28.264) 31.884,30.53 ccw(c29.31,27.956) 26.736,30.53
  lines w0.486: 25.335,26.617 ccw(c22.452,29.5) 25.335,32.383 ; 25.665,26.617 cw(c28.548,29.5) 25.665,32.383
  text "RADMEHR" at 29.139,20.906 h1.62
  text "MORADKHANI" at 30.423,19.791 h1.62
Top Solder:
  region: 55.7,5.72 58.2,5.72 cw(c58.2,4.72) 59.2,4.72 59.2,2.12 cw(c58.3,2.12) 58.3,1.22 55.6,1.22 cw(c55.6,2.02) 54.8,2.02 54.8,4.82 cw(c55.7,4.82)
  region: 55.7,8.26 58.2,8.26 cw(c58.2,7.26) 59.2,7.26 59.2,4.66 cw(c58.3,4.66) 58.3,3.76 55.6,3.76 cw(c55.6,4.56) 54.8,4.56 54.8,7.36 cw(c55.7,7.36)
  region: 55.7,38.74 58.2,38.74 cw(c58.2,37.74) 59.2,37.74 59.2,35.14 cw(c58.3,35.14) 58.3,34.24 55.6,34.24 cw(c55.6,35.04) 54.8,35.04 54.8,37.84 cw(c55.7,37.84)
  region: 55.7,15.88 58.2,15.88 cw(c58.2,14.88) 59.2,14.88 59.2,12.28 cw(c58.3,12.28) 58.3,11.38 55.6,11.38 cw(c55.6,12.18) 54.8,12.18 54.8,14.98 cw(c55.7,14.98)
  region: 55.7,23.5 58.2,23.5 cw(c58.2,22.5) 59.2,22.5 59.2,19.9 cw(c58.3,19.9) 58.3,19 55.6,19 cw(c55.6,19.8) 54.8,19.8 54.8,22.6 cw(c55.7,22.6)
  region: 55.7,31.12 58.2,31.12 cw(c58.2,30.12) 59.2,30.12 59.2,27.52 cw(c58.3,27.52) 58.3,26.62 55.6,26.62 cw(c55.6,27.42) 54.8,27.42 54.8,30.22 cw(c55.7,30.22)
Bottom Solder:
  region: 55.7,5.72 58.2,5.72 cw(c58.2,4.72) 59.2,4.72 59.2,2.12 cw(c58.3,2.12) 58.3,1.22 55.6,1.22 cw(c55.6,2.02) 54.8,2.02 54.8,4.82 cw(c55.7,4.82)
  region: 55.7,8.26 58.2,8.26 cw(c58.2,7.26) 59.2,7.26 59.2,4.66 cw(c58.3,4.66) 58.3,3.76 55.6,3.76 cw(c55.6,4.56) 54.8,4.56 54.8,7.36 cw(c55.7,7.36)
  region: 55.7,15.88 58.2,15.88 cw(c58.2,14.88) 59.2,14.88 59.2,12.28 cw(c58.3,12.28) 58.3,11.38 55.6,11.38 cw(c55.6,12.18) 54.8,12.18 54.8,14.98 cw(c55.7,14.98)
  region: 55.7,23.5 58.2,23.5 cw(c58.2,22.5) 59.2,22.5 59.2,19.9 cw(c58.3,19.9) 58.3,19 55.6,19 cw(c55.6,19.8) 54.8,19.8 54.8,22.6 cw(c55.7,22.6)
  region: 55.7,31.12 58.2,31.12 cw(c58.2,30.12) 59.2,30.12 59.2,27.52 cw(c58.3,27.52) 58.3,26.62 55.6,26.62 cw(c55.6,27.42) 54.8,27.42 54.8,30.22 cw(c55.7,30.22)
  region: 55.7,38.74 58.2,38.74 cw(c58.2,37.74) 59.2,37.74 59.2,35.14 cw(c58.3,35.14) 58.3,34.24 55.6,34.24 cw(c55.6,35.04) 54.8,35.04 54.8,37.84 cw(c55.7,37.84)

## Text inside footprints (layer, text, board x,y; h text height)
P2: Top Overlay "2" at 2,1.5 h0.6; Top Overlay "1" at 0.5,1.5 h0.6; Top Overlay "10" at 2,13 h0.6; Top Overlay "9" at 0.6,13 h0.6